# Altium PCB 宁波2号线PIS_数字功率放大器_网络音频(BHC-A-2030-02)_PCB(06001537)_V1.0.PcbDoc (part 3 of 7)
Units mm, origin at the board's own origin, x right, y up, seen from the top; angles counter-clockwise.
Board outline 86 x 96 mm, 4 copper layers (Top Layer, GND, VDD, Bottom Layer); 204 components, 185 nets, 781 pads, 267 vias.
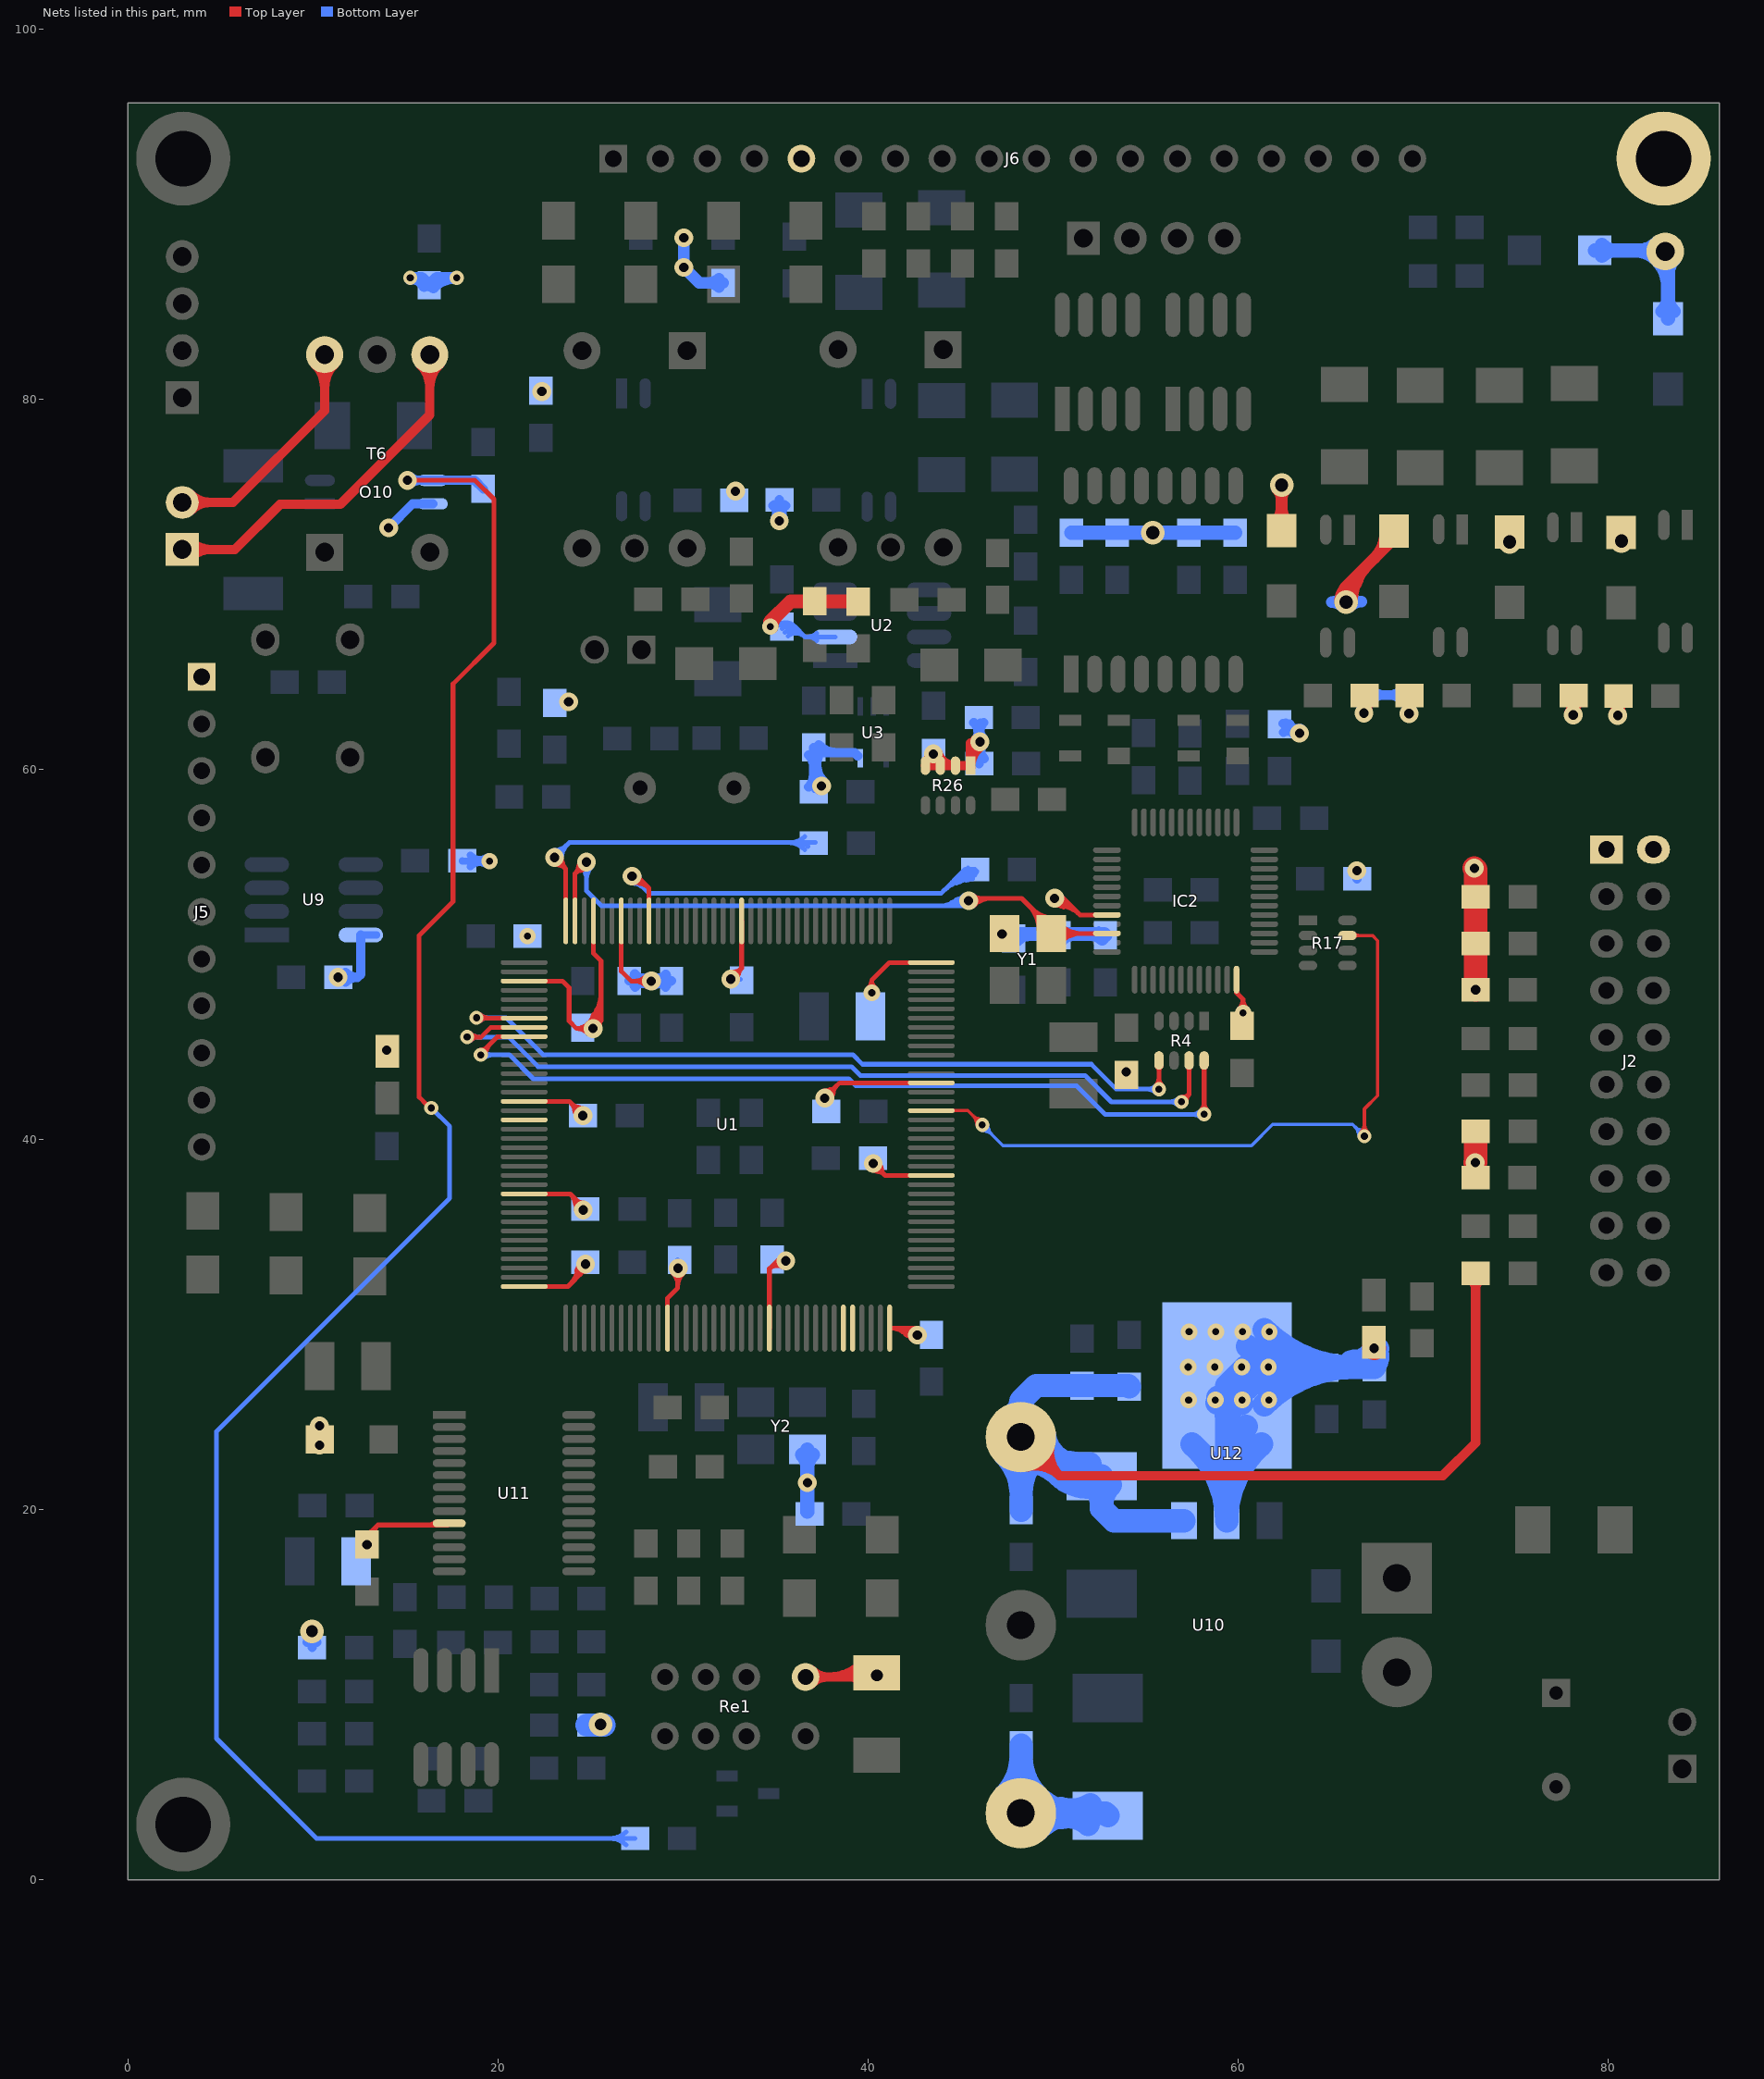
[diagram p5: the nets of this part, all layers, seen from the top]

## Via types
v1: diameter 1.016, hole 0.508, Top Layer to Bottom Layer, 122 vias
v2: diameter 0.762, hole 0.381, Top Layer to Bottom Layer, 48 vias
v3: diameter 0.889, hole 0.381, Top Layer to Bottom Layer, 37 vias
v4: diameter 1.27, hole 0.635, Top Layer to Bottom Layer, 28 vias
v5: diameter 1.27, hole 0.711, Top Layer to Bottom Layer, 20 vias
v6: diameter 0.762, hole 0.457, Top Layer to Bottom Layer, 11 vias
v7: diameter 1.143, hole 0.635, Top Layer to Bottom Layer, 1 vias

## Nets (pads, with @x,y where several pads share a name; then routed paths per layer and width w, separated by ;. In a path a pad name is that pad's centre, name@x,y a point inside that pad or via, vN(x,y) a via of type N, cw(c..) or ccw(c..) an arc to the next point about the centre after c; other vN are vias at no path point) (continued)
DC+3.3V: C7.1 C8.2 C9.1 C11.2 C22.2 C24.2 C34.2 C38.1 C39.2 C40.2 C41.2 C42.2 C43.2 C44.2 C47.2 C48.2 C49.2 C50.2 C51.2 C52.2 C53.2 C65.1 C66.1 C71.1 C74.1 IC2.32 IC2.48 J2.1 J2.2 J5.1 L3.1 L6.2 LED1.1 LED2.1 O10.4 R2.1 R7.2 R8.1 R10.1 R12.2 R13.1 R14.2 R15.2 R18.1 R21.2 R25.2 R26.1 R26.2 R26.3 R26.4 R32.1 R34.2 R36.2 R38.1 R43.2 R44.1 R45.1 R46.1 R47.1 R55.1 R56.1 R60.1 R61.1 R62.1 R65.1 R66.1 U1.17 U1.30 U1.33 U1.39 U1.52 U1.62 U1.72 U1.84 U1.95 U1.108 U1.121 U1.131 U1.144 U2.2 U3.5 U9.8 U11.10 U12.2 U12.4 Y1.4 Y2.4 | length 511.8
  Top Layer w0.254: v1(12.927,18.119) 12.927,18.592 13.513,19.177 ; C65.1@13.022,18.035 ccw(c12.314,18.668) C65.1@13.262,18.721 ; 16.442,19.218 cw(c16.533,19.061) U11.10@16.643,19.205 ; U11.10@17.374,19.271 17.28,19.177 13.513,19.177 ; U1.72@21.423,32.066 23.786,32.066 v1@24.587,32.868 ; U1.62@21.423,37.066 23.919,37.066 ; U1.52@21.423,42.066 23.872,42.066 v1@24.562,41.377 ; U1.39@21.423,48.566 23.494,48.566 23.851,48.209 23.851,46.406 24.257,45.999 ; 24.122,32.393 cw(c25.236,32.095) v1@24.789,33.157 ; 24.135,41.597 ccw(c24.707,41.75) v1@24.566,41.176 ; 24.155,36.629 ccw(c24.932,36.776) v1@24.551,36.084 ; 24.257,32.894 cw(c24.981,32.7) v1@24.69,33.391 ; 24.332,41.751 cw(c24.193,41.234) v1@24.722,41.32 ; v1@24.41,33.083 cw(c23.976,32.833) 24.46,32.703 ; v1@24.613,36.373 23.919,37.066 ; v1@25.047,46.367 ccw(c24.918,46.851) 25.352,46.601 ; U1.33@25.173,51.816 25.173,50.061 25.578,49.657 25.578,46.431 ; 25.176,46.749 ccw(c25.641,46.458) v1@25.239,46.086 ; v1@25.252,46.365 ccw(c25.331,46.635) 25.573,46.494 ; 25.352,47.03 ccw(c25.893,46.692) v1@25.425,46.258 ; v1@25.478,46.186 cw(c26.041,46.503) 25.482,46.826 ; v1@25.514,46.098 cw(c25.998,46.228) 25.564,46.478 ; U1.30@26.673,51.816 26.673,49.095 27.203,48.565 v1(28.296,48.565) ; U1.84@29.173,29.816 29.173,31.434 29.718,31.979 v1@29.718,32.741 ; v1@32.472,48.718 cw(c33.094,48.444) 32.969,49.112 ; v1(32.588,48.666) 33.173,49.252 ; v1@32.639,48.55 ccw(c32.366,49.172) 33.034,49.048 ; U1.17@33.173,51.816 33.173,49.252 ; U1.95@34.673,29.816 34.673,33.022 ; v1(35.56,33.452) 35.103,33.452 34.673,33.022 ; v1@37.543,42.263 cw(c38.081,42.166) 37.94,42.694 ; v1(37.668,42.24) 37.668,42.266 38.469,43.066 U1.131@43.423,43.066 ; v1@37.697,42.116 ccw(c37.567,42.682) 38.127,42.532 ; v1@40.16,38.682 ccw(c40.716,38.805) 40.573,38.254 ; v3(40.208,47.93) 40.208,48.616 ; v1(40.284,38.71) 40.928,38.066 ; v1@40.312,38.834 cw(c40.189,38.278) 40.74,38.421 ; 41.832,29.64 ccw(c42.083,29.953) v1@42.385,29.689 ; 42.039,29.474 ccw(c42.283,29.779) v1@42.576,29.522 ; v1@42.292,29.417 ccw(c41.893,29.394) 42.143,29.705 ccw(c42.271,29.865) v1@42.411,29.716 ; v1@42.647,29.816 U1.108@41.173,29.816 ; U1.121@43.423,38.066 40.928,38.066 ; U1.144@43.423,49.566 41.159,49.566 40.208,48.616 ; v1@49.983,52.965 ccw(c50.776,53.488) 50.585,52.558 ; v1(50.089,53.035) 50.571,53.035 51.467,52.14 ; v1@50.298,52.717 cw(c50.574,52.299) 50.675,52.789 ; IC2.32@52.917,52.14 51.467,52.14 ; R8.1@53.924,44.094 53.959,44.06 R8.1@53.959,43.493 ; IC2.48@59.917,48.64 59.917,47.931 60.274,47.574 ; v3(60.274,46.838) 60.274,47.574 ; 13.513,19.177 ccw(c14.164,18.526) 13.289,18.238 cw(c14.164,18.526) 13.513,19.177 ; 13.513,19.177 ccw(c13.96,18.73) 13.387,18.462 cw(c13.96,18.73) 13.513,19.177 ; 23.919,37.066 cw(c23.156,36.303) 24.233,36.223 ccw(c23.156,36.303) 23.919,37.066 ; 24.257,45.999 cw(c24.257,45.153) 24.87,45.737 ccw(c24.257,45.153) 24.257,45.999 ; 24.257,45.999 ccw(c24.257,46.846) 24.87,46.262 cw(c24.257,46.846) 24.257,45.999 ; 24.257,45.999 v1(25.146,45.999) 25.578,46.431 ; 25.578,46.431 cw(c25.366,46.643) 25.27,46.36 ccw(c25.366,46.643) 25.578,46.431 ; 25.578,46.431 ccw(c25.789,46.22) 25.506,46.123 cw(c25.789,46.22) 25.578,46.431 ; 27.376,48.565 cw(c27.376,47.645) 28.026,48.295 ccw(c27.376,47.645) 27.376,48.565 ; 27.376,48.565 ccw(c27.376,49.485) 28.026,48.834 cw(c27.376,49.485) 27.376,48.565 ; 33.173,49.252 cw(c32.673,49.752) 32.618,49.046 ccw(c32.673,49.752) 33.173,49.252 ; 33.173,49.252 ccw(c33.674,48.751) 32.968,48.696 cw(c33.674,48.751) 33.173,49.252 ; 34.673,33.022 cw(c35.088,32.608) 35.374,33.119 ccw(c35.088,32.608) 34.673,33.022 ; 40.208,48.616 cw(c39.626,48.616) 40.003,48.172 ccw(c39.626,48.616) 40.208,48.616 ; 40.208,48.616 ccw(c40.79,48.616) 40.414,48.172 cw(c40.79,48.616) 40.208,48.616 ; 40.928,38.066 cw(c41.562,38.7) 40.665,38.707 ccw(c41.562,38.7) 40.928,38.066 ; 40.928,38.066 ccw(c40.294,37.432) 40.287,38.329 cw(c40.294,37.432) 40.928,38.066 ; U1.108@41.173,29.816 cw(c41.173,28.337) 42.365,29.213 ccw(c41.173,28.337) U1.108@41.173,29.816 ; 51.467,52.14 ccw(c50.216,50.888) 50.111,52.655 cw(c50.216,50.888) 51.467,52.14 ; 60.274,47.574 cw(c59.579,47.574) 60.056,47.068 ccw(c59.579,47.574) 60.274,47.574 ; 60.274,47.574 ccw(c60.97,47.574) 60.492,47.068 cw(c60.97,47.574) 60.274,47.574 ; 60.274,47.574 cw(c58.966,47.574) 59.871,46.629 ccw(c58.966,47.574) 60.274,47.574 ; C65.1@12.927,18.754 ccw(c12.927,19.147) 13.205,18.869 cw(c12.927,19.147) C65.1@12.927,18.754 ; C65.1@13.048,18.159 cw(c13.724,18.382) 13.221,18.885 ccw(c13.724,18.382) C65.1@13.048,18.159 ; C65.1@13.157,18.354 cw(c13.611,18.567) 13.257,18.921 ccw(c13.611,18.567) C65.1@13.157,18.354 ; 16.267,19.177 ccw(c16.267,19.697) 16.635,19.329 cw(c16.267,19.697) 16.267,19.177 ; 23.91,32.19 ccw(c22.826,33.274) 24.359,33.274 cw(c22.826,33.274) 23.91,32.19 ; 23.916,42.023 cw(c23.192,41.299) 24.215,41.299 ccw(c23.192,41.299) 23.916,42.023 ; 24.019,41.919 ccw(c24.596,42.497) 24.596,41.68 cw(c24.596,42.497) 24.019,41.919 ; 24.266,36.72 ccw(c24.613,37.067) 24.613,36.576 cw(c24.613,37.067) 24.266,36.72 ; 24.311,36.674 cw(c23.886,36.249) 24.486,36.204 ccw(c23.886,36.249) 24.311,36.674 ; 24.343,32.624 ccw(c23.693,33.274) 24.613,33.274 cw(c23.693,33.274) 24.343,32.624 ; 24.523,32.803 cw(c24.74,32.586) 24.74,32.893 ccw(c24.74,32.586) 24.523,32.803 ; v1@24.877,46.269 ccw(c23.184,47.962) 25.578,47.962 cw(c23.184,47.962) v1@24.877,46.269 ; v1@25.056,46.089 ccw(c23.797,47.348) 25.578,47.348 cw(c23.797,47.348) v1@25.056,46.089 ; v1@25.236,45.91 ccw(c24.41,46.735) 25.578,46.735 cw(c24.41,46.735) v1@25.236,45.91 ; v1@29.474,32.776 cw(c28.885,32.187) 29.718,32.187 ccw(c28.885,32.187) v1@29.474,32.776 ; 29.718,32.064 cw(c30.725,32.064) 30.013,32.776 ccw(c30.725,32.064) 29.718,32.064 ; 34.911,33.26 cw(c35.258,32.912) 35.498,33.341 ccw(c35.258,32.912) 34.911,33.26 ; v1@37.668,42.621 ccw(c37.668,43.48) 38.275,42.873 cw(c37.668,43.48) v1@37.668,42.621 ; v1@38.049,42.24 cw(c39.03,42.24) 38.337,42.934 ccw(c39.03,42.24) v1@38.049,42.24 ; 41.675,29.816 cw(c41.675,28.706) 42.57,29.363 ccw(c41.675,28.706) 41.675,29.816 ; 42.177,29.816 cw(c42.177,29.075) 42.774,29.514 ccw(c42.177,29.075) 42.177,29.816 ; v1@50.081,53.162 cw(c50.126,52.398) 50.667,52.939 ccw(c50.126,52.398) v1@50.081,53.162 ; v1@50.096,52.908 cw(c50.171,51.643) 51.067,52.539 ccw(c50.171,51.643) v1@50.096,52.908 ; IC2.48@59.94,48.04 ccw(c60.257,48.04) 60.033,47.815 cw(c60.257,48.04) IC2.48@59.94,48.04 ; C9.1@60.047,46.446 ccw(c59.536,46.979) 60.274,46.979 cw(c59.536,46.979) C9.1@60.047,46.446 ; 60.274,47.363 ccw(c61.323,47.363) 60.581,46.622 cw(c61.323,47.363) 60.274,47.363
  Top Layer w0.508: v1(13.995,44.831) 14.021,44.806 LED1.1@14.021,44.78 ; R26.4@43.104,60.198 R26.3@43.917,60.198 R26.2@44.729,60.198 ; v1@43.292,60.76 ccw(c44.047,60.986) R26.3@44.047,60.198 ; v1@43.779,60.906 ccw(c44.729,61.19) R26.2@44.729,60.198 ; R26.1@45.542,60.102 cw(c46.94,60.102) v1@46.187,61.279 ; 45.542,61.03 cw(c46.347,61.03) v1@45.913,61.707 ; 45.542,61.417 R26.1@45.542,60.198 R26.2@44.729,60.198 ; v1@66.712,63.28 ccw(c66.498,63.842) R61.1@67.078,63.686 ; R61.1@66.764,63.672 cw(c66.517,63.29) 66.972,63.29 cw(c67.429,63.29) R61.1@67.18,63.673 ; v1@66.845,63.043 R61.1@66.845,63.992 ; R55.1@69.24,64.016 R55.1@69.274,64.049 ; R62.1@77.817,63.67 cw(c77.574,63.283) 78.031,63.283 cw(c78.512,63.283) R62.1@78.238,63.679 ; v1@77.904,63.083 ccw(c77.484,63.367) R62.1@77.973,63.498 ; R62.1@77.973,63.498 ccw(c78.494,63.638) v1@78.236,63.164 ; v1@78,63.168 ccw(c77.709,63.75) R62.1@78.338,63.582 ; R62.1@78.032,63.698 cw(c77.657,63.243) 78.247,63.243 cw(c78.756,63.243) R62.1@78.481,63.672 ; v1(78.114,62.941) R62.1@78.114,63.958 ; R56.1@80.22,63.652 cw(c79.97,63.259) 80.436,63.259 cw(c80.928,63.259) R56.1@80.644,63.662 ; v1@80.307,63.058 ccw(c79.883,63.344) 80.377,63.476 ccw(c80.909,63.619) v1@80.641,63.138 ; v1@80.403,63.142 ccw(c80.103,63.731) R56.1@80.741,63.56 ; R56.1@80.434,63.681 cw(c80.048,63.219) 80.65,63.219 cw(c81.168,63.219) R56.1@80.886,63.654 ; v1(80.518,62.916) R56.1@80.518,63.94 ; v1@66.708,63.279 ccw(c66.537,63.708) R61.1@66.983,63.588 ; v1@66.708,63.279 ccw(c66.537,63.708) R61.1@66.983,63.588 ; v1@66.708,63.279 ccw(c66.537,63.708) R61.1@66.983,63.588 ; v1@66.845,63.072 cw(c67.764,63.072) 67.114,63.723 ccw(c67.764,63.072) v1@66.845,63.072 ; v1@66.845,63.072 ccw(c65.925,63.072) 66.575,63.723 cw(c65.925,63.072) v1@66.845,63.072 ; R61.1@66.972,63.548 ccw(c67.454,63.419) v1@67.022,63.17 ; R61.1@66.972,63.548 ccw(c67.454,63.419) v1@67.022,63.17 ; R61.1@66.972,63.548 ccw(c67.454,63.419) v1@67.022,63.17 ; v1@77.937,63.123 ccw(c77.693,63.374) R62.1@78.031,63.464 ; v1@77.937,63.123 ccw(c77.693,63.374) R62.1@78.031,63.464 ; v1@77.937,63.123 ccw(c77.693,63.374) R62.1@78.031,63.464 ; v1@77.993,63.164 ccw(c77.745,63.621) R62.1@78.247,63.487 ; v1@77.993,63.164 ccw(c77.745,63.621) R62.1@78.247,63.487 ; v1@77.993,63.164 ccw(c77.745,63.621) R62.1@78.247,63.487 ; R62.1@78.114,63.554 cw(c77.501,63.554) 77.934,63.121 ccw(c77.501,63.554) R62.1@78.114,63.554 ; R62.1@78.114,63.554 ccw(c78.727,63.554) 78.294,63.121 cw(c78.727,63.554) R62.1@78.114,63.554 ; R62.1@78.247,63.487 ccw(c78.7,63.365) v1@78.32,63.09 ; R62.1@78.247,63.487 ccw(c78.7,63.365) v1@78.32,63.09 ; R62.1@78.247,63.487 ccw(c78.7,63.365) v1@78.32,63.09 ; v1@80.341,63.098 ccw(c80.094,63.351) R56.1@80.436,63.442 ; v1@80.341,63.098 ccw(c80.094,63.351) R56.1@80.436,63.442 ; v1@80.341,63.098 ccw(c80.094,63.351) R56.1@80.436,63.442 ; v1@80.395,63.138 ccw(c80.136,63.603) R56.1@80.65,63.465 ; v1@80.395,63.138 ccw(c80.136,63.603) R56.1@80.65,63.465 ; v1@80.395,63.138 ccw(c80.136,63.603) R56.1@80.65,63.465 ; R56.1@80.518,63.529 cw(c79.905,63.529) 80.338,63.095 ccw(c79.905,63.529) R56.1@80.518,63.529 ; R56.1@80.518,63.529 ccw(c81.131,63.529) 80.698,63.095 cw(c81.131,63.529) R56.1@80.518,63.529 ; R56.1@80.65,63.465 ccw(c81.108,63.342) v1@80.724,63.065 ; R56.1@80.65,63.465 ccw(c81.108,63.342) v1@80.724,63.065 ; R56.1@80.65,63.465 ccw(c81.108,63.342) v1@80.724,63.065 ; v1@66.622,63.222 ccw(c66.086,63.759) 66.845,63.759 cw(c66.086,63.759) v1@66.622,63.222 ; R61.1@66.845,63.553 ccw(c67.312,63.553) 66.982,63.222 cw(c67.312,63.553) R61.1@66.845,63.553 ; R62.1@77.878,63.723 cw(c77.309,63.153) 78.114,63.153 ccw(c77.309,63.153) R62.1@77.878,63.723 ; v1@78.114,62.991 cw(c79.149,62.991) 78.417,63.723 ccw(c79.149,62.991) v1@78.114,62.991 ; R56.1@80.282,63.704 cw(c79.713,63.135) 80.518,63.135 ccw(c79.713,63.135) R56.1@80.282,63.704 ; v1@80.518,62.972 cw(c81.553,62.972) 80.821,63.704 ccw(c81.553,62.972) v1@80.518,62.972
  Top Layer w0.762: v3(34.722,67.716) 34.722,67.97 35.822,69.071 R7.2@39.481,69.071 ; v3@34.785,67.716 cw(c35.552,67.716) 35.01,68.258 ccw(c35.552,67.716) v3@34.785,67.716 ; 36.444,69.071 ccw(c36.444,69.771) 36.939,69.276 cw(c36.444,69.771) 36.444,69.071 ; R25.2@37.298,69.276 ccw(c37.793,69.771) 37.793,69.071 cw(c37.793,69.771) R25.2@37.298,69.276
  Top Layer w1.27: LED2.1@67.335,28.753 v1(67.361,28.727) ; v1(72.771,54.661) 72.839,54.593 R12.2@72.839,53.121 v1(72.839,48.092) ; v1(72.822,38.76) 72.839,38.778 R15.2@72.839,40.446
  Bottom Layer w0.254: C39.2@24.562,41.377 C39.2@24.596,41.342 ; C48.2@24.596,33.359 C48.2@24.613,33.376 ; C47.2@24.622,36.331 C47.2@24.638,36.347 ; C40.2@25.111,46.034 v1(25.146,45.999) ; C49.2@29.718,33.452 C49.2@29.718,33.511 ; C43.2@33.122,48.656 C43.2@33.122,48.666 ; C24.2@35.358,67.726 36.033,67.726 ; R18.1@37.092,58.861 37.092,59.504 ; 37.109,59.665 37.092,59.647 ; U2.2@38.227,67.158 36.601,67.158 ; C52.2@40.275,38.719 v1(40.284,38.71) ; C7.1@47.304,51.045 C8.2@50.316,51.045 C11.2@52.831,51.045 ; 36.033,67.726 cw(c36.033,67.921) 35.846,67.866 ccw(c36.033,67.921) 36.033,67.726 ; 36.033,67.726 ccw(c36.033,67.531) 35.846,67.585 cw(c36.033,67.531) 36.033,67.726 ; 36.033,67.726 36.601,67.158 ; 36.601,67.158 ccw(c36.114,66.67) 35.679,67.205 cw(c36.114,66.67) 36.601,67.158 ; 36.768,67.158 cw(c36.768,66.499) 37.234,66.965 ccw(c36.768,66.499) 36.768,67.158 ; 36.768,67.158 ccw(c36.768,67.817) 37.234,67.351 cw(c36.768,67.817) 36.768,67.158 ; R18.1@36.92,59.271 ccw(c36.849,59.504) 37.092,59.504 ; R18.1@36.92,59.271 ccw(c36.849,59.504) 37.092,59.504 ; R18.1@36.92,59.271 ccw(c36.849,59.504) 37.092,59.504 ; R18.1@36.92,59.271 ccw(c36.849,59.504) 37.092,59.504 ; 37.092,59.504 ccw(c37.361,59.504) R18.1@37.259,59.255 ; 37.092,59.504 ccw(c37.361,59.504) R18.1@37.259,59.255 ; 37.092,59.504 ccw(c37.361,59.504) R18.1@37.259,59.255 ; 37.092,59.504 ccw(c37.361,59.504) R18.1@37.259,59.255 ; 37.092,59.504 37.092,59.647 ; 37.092,59.647 cw(c36.636,59.647) 36.84,59.24 ccw(c36.636,59.647) 37.092,59.647 ; 37.092,59.647 ccw(c37.596,59.647) 37.333,59.218 cw(c37.596,59.647) 37.092,59.647 ; 49.09,51.045 cw(c49.09,49.818) 49.957,50.686 ccw(c49.09,49.818) 49.09,51.045 ; 49.09,51.045 ccw(c49.09,52.271) 49.957,51.404 cw(c49.09,52.271) 49.09,51.045 ; 51.543,51.045 cw(c51.543,52.271) 50.675,51.404 ccw(c51.543,52.271) 51.543,51.045 ; 51.543,51.045 ccw(c51.543,49.818) 50.675,50.686 cw(c51.543,49.818) 51.543,51.045 ; 51.604,51.045 cw(c51.604,49.818) 52.472,50.686 ccw(c51.604,49.818) 51.604,51.045 ; 51.604,51.045 ccw(c51.604,52.271) 52.472,51.404 cw(c51.604,52.271) 51.604,51.045 ; C24.2@35.198,67.796 cw(c35.578,67.328) 36.005,67.754 ccw(c35.578,67.328) C24.2@35.198,67.796 ; C24.2@35.358,67.599 cw(c35.757,67.109) 36.204,67.555 ccw(c35.757,67.109) C24.2@35.358,67.599 ; C24.2@35.518,67.402 cw(c35.935,66.89) 36.402,67.357 ccw(c35.935,66.89) C24.2@35.518,67.402 ; C7.1@47.513,50.835 cw(c48.019,50.33) 48.019,51.045 ccw(c48.019,50.33) C7.1@47.513,50.835 ; C7.1@47.513,51.374 ccw(c48.309,52.169) 48.309,51.045 cw(c48.309,52.169) C7.1@47.513,51.374 ; C7.1@48.059,50.824 cw(c48.593,50.29) 48.593,51.045 ccw(c48.593,50.29) C7.1@48.059,50.824 ; C7.1@48.238,50.644 cw(c49.206,49.676) 49.206,51.045 ccw(c49.206,49.676) C7.1@48.238,50.644 ; C7.1@48.238,51.362 ccw(c49.005,52.129) 49.005,51.045 cw(c49.005,52.129) C7.1@48.238,51.362
  Bottom Layer w0.381: U9.8@12.598,51.054 U9.8@13.462,51.054 ; R66.1@18.077,55.058 18.093,55.042 v3(19.558,55.042) ; 18.857,55.165 ccw(c19.037,55.839) v3@19.419,55.254 ; 18.857,55.165 ccw(c19.037,55.839) v3@19.419,55.254 ; 18.857,55.165 ccw(c19.037,55.839) v3@19.419,55.254 ; 18.867,54.942 cw(c19.03,54.337) v3@19.406,54.839 ; 18.867,54.942 cw(c19.03,54.337) v3@19.406,54.839 ; 18.867,54.942 cw(c19.03,54.337) v3@19.406,54.839 ; 18.945,55.042 cw(c18.945,54.429) 19.378,54.862 ccw(c18.945,54.429) 18.945,55.042 ; 18.945,55.042 ccw(c18.945,55.655) 19.378,55.221 cw(c18.945,55.655) 18.945,55.042 ; 19.096,55.101 cw(c18.993,54.715) v3@19.338,54.915 ; 19.096,55.101 cw(c18.993,54.715) v3@19.338,54.915 ; 19.096,55.101 cw(c18.993,54.715) v3@19.338,54.915 ; R66.1@18.518,54.743 cw(c19.238,54.023) 19.238,55.042 ccw(c19.238,54.023) R66.1@18.518,54.743 ; R66.1@18.518,55.372 ccw(c19.315,56.17) 19.315,55.042 cw(c19.315,56.17) R66.1@18.518,55.372
  Bottom Layer w0.508: v1(11.37,48.769) 12.422,48.769 12.598,48.946 U9.8@12.598,51.054 ; v1(14.097,73.05) 15.392,74.346 O10.4@16.485,74.346 ; C42.2@27.101,48.581 C41.2@29.387,48.581 29.37,48.565 v1(28.296,48.565) ; C42.2@27.37,48.439 cw(c27.951,47.857) v1@27.951,48.679 ; C42.2@27.37,48.723 ccw(c27.917,49.271) v1@27.917,48.497 ; C42.2@27.398,48.947 ccw(c27.955,49.395) v1@27.955,48.679 ; C42.2@27.411,48.232 cw(c27.924,47.865) v1@27.924,48.497 ; C42.2@27.657,48.759 cw(c27.478,48.093) v1@28.076,48.438 ; C42.2@27.659,48.426 cw(c27.823,47.815) v1@28.16,48.35 ; 27.762,48.731 ccw(c27.9,49.249) v1@28.169,48.785 ; 27.766,48.454 ccw(c27.634,48.947) v1@28.076,48.692 ; v1@28.423,48.345 cw(c28.73,47.812) C41.2@28.889,48.406 ; v1@28.436,48.353 cw(c28.732,47.905) C41.2@28.871,48.423 ; v1@28.516,48.439 cw(c29.156,48.075) C41.2@28.966,48.786 ; v1@28.517,48.44 cw(c29.115,48.101) C41.2@28.937,48.765 ; C41.2@28.783,48.737 cw(c28.66,49.196) 28.423,48.785 ccw(c28.682,49.235) C41.2@28.817,48.733 ; C41.2@28.862,48.426 cw(c29.01,48.977) 28.516,48.692 ccw(c29.045,48.997) C41.2@28.887,48.407 ; C41.2@29.064,48.251 ccw(c28.642,47.987) 28.642,48.485 ccw(c28.642,49.07) C41.2@29.093,48.697 ; C41.2@29.069,48.243 ccw(c28.639,47.956) 28.639,48.473 ccw(c28.639,49.046) C41.2@29.088,48.691 ; C41.2@29.07,48.92 cw(c28.62,49.222) 28.62,48.68 cw(c28.62,48.052) C41.2@29.097,48.46 ; C41.2@29.077,48.93 cw(c28.612,49.264) 28.612,48.691 cw(c28.612,48.066) C41.2@29.093,48.465 ; R10.1@34.866,74.247 cw(c34.527,73.768) 35.114,73.768 cw(c35.797,73.768) R10.1@35.34,74.275 ; v1@34.993,73.55 ccw(c34.479,73.847) R10.1@35.052,74.001 ; R10.1@35.045,74.027 ccw(c35.656,74.191) v1@35.34,73.643 ; R10.1@35.085,74.275 cw(c34.628,73.768) 35.311,73.768 cw(c35.898,73.768) R10.1@35.559,74.247 ; v1@35.086,73.643 ccw(c34.769,74.191) R10.1@35.381,74.027 ; v1(35.213,73.423) R10.1@35.213,74.558 ; R10.1@35.373,74.001 ccw(c35.947,73.847) v1@35.433,73.55 ; R43.2@36.877,60.723 cw(c36.557,60.168) 37.177,60.334 ; R43.2@37.068,61.18 37.068,59.528 ; R43.2@37.119,60.901 38.356,60.901 ; 37.209,60.084 cw(c36.366,59.598) R18.1@37.258,59.208 ; 37.278,59.954 cw(c38.435,60.264) R43.2@37.398,60.863 ; v1(37.49,59.106) 37.092,59.504 37.068,59.528 ; U3.5@39.446,60.731 39.277,60.901 38.356,60.901 ; R34.2@45.722,62.535 cw(c44.929,61.742) v1@46.05,61.742 ; R36.2@45.747,60.585 ccw(c45.097,61.235) 46.017,61.235 ccw(c46.936,61.235) R36.2@46.286,60.585 ; v1@45.833,61.362 cw(c45.252,61.009) R36.2@45.909,60.833 ; v1@45.838,61.633 ccw(c45.257,62.015) R34.2@45.929,62.195 ; v1@45.871,61.314 cw(c45.518,60.961) 46.017,60.961 ; v1@45.871,61.673 ccw(c45.437,62.107) 46.05,62.107 ccw(c46.663,62.107) v1@46.23,61.673 ; 45.946,60.972 cw(c46.425,60.844) v1@46.177,61.273 ; R36.2@46.017,60.316 46.017,61.46 v1(46.05,61.493) 46.05,62.46 R34.2@46.084,62.494 ; R36.2@46.017,60.799 cw(c46.745,60.799) v1@46.23,61.314 ; 46.05,62.027 cw(c46.768,62.027) R34.2@46.261,62.535 ; R36.2@46.095,60.942 cw(c46.426,61.03) v1@46.21,61.296 ; L3.1@62.443,62.476 v1@62.968,61.951 ; L3.1@62.448,62.004 cw(c62.675,61.658) v1@62.968,61.951 ; L3.1@62.581,62.491 ccw(c63.449,62.917) v1@63.449,61.951 ; L3.1@62.811,62.444 ccw(c63.449,62.609) v1@63.449,61.951 ; v1@63.283,62.202 cw(c63.133,63.166) 62.443,62.476 ccw(c63.171,63.204) v1@63.394,62.199 ; v1(66.421,54.534) 66.429,54.526 R21.2@66.429,54.086 ; 66.575,63.755 cw(c65.941,63.12) v1@66.838,63.12 ; v1@66.838,63.043 66.838,64.017 69.223,64.017 v1@69.223,63.144 ; v1@66.838,63.088 cw(c67.78,63.088) 67.114,63.755 ; 67.241,63.755 cw(c67.875,63.12) 67.875,64.017 ; 67.241,64.293 ccw(c67.907,64.96) 67.907,64.017 ; 68.827,63.748 ccw(c68.176,63.098) 68.176,64.017 ccw(c68.176,64.937) 68.827,64.287 ; 68.964,63.738 cw(c68.414,63.144) v1@69.223,63.144 ; 69.482,63.738 ccw(c70.033,63.144) v1@69.223,63.144 ; C53.2@11.983,48.769 cw(c11.983,49.382) 11.55,48.949 ccw(c11.983,49.382) C53.2@11.983,48.769 ; C53.2@11.983,48.769 ccw(c11.983,48.156) 11.55,48.59 cw(c11.983,48.156) C53.2@11.983,48.769 ; 12.417,48.769 cw(c12.417,49.689) 11.766,49.039 ccw(c12.417,49.689) 12.417,48.769 ; 12.417,48.769 ccw(c12.417,47.849) 11.766,48.5 cw(c12.417,47.849) 12.417,48.769 ; C42.2@27.653,48.679 ccw(c27.804,49.242) v1@28.147,48.77 ; C42.2@27.653,48.679 ccw(c27.804,49.242) v1@28.147,48.77 ; C42.2@27.653,48.679 ccw(c27.804,49.242) v1@28.147,48.77 ; C42.2@27.706,48.497 cw(c27.815,48.089) v1@28.115,48.386 ; C42.2@27.706,48.497 cw(c27.815,48.089) v1@28.115,48.386 ; C42.2@27.706,48.497 cw(c27.815,48.089) v1@28.115,48.386 ; v1@28.02,48.581 cw(c28.02,49.501) 27.37,48.85 ccw(c28.02,49.501) v1@28.02,48.581 ; v1@28.02,48.581 ccw(c28.02,47.661) 27.37,48.312 cw(c28.02,47.661) v1@28.02,48.581 ; v1@28.444,48.771 ccw(c28.745,49.19) C41.2@28.879,48.691 ; v1@28.444,48.771 ccw(c28.745,49.19) C41.2@28.879,48.691 ; v1@28.444,48.771 ccw(c28.745,49.19) C41.2@28.879,48.691 ; v1@28.453,48.764 ccw(c28.739,49.124) C41.2@28.858,48.68 ; v1@28.453,48.764 ccw(c28.739,49.124) C41.2@28.858,48.68 ; v1@28.453,48.764 ccw(c28.739,49.124) C41.2@28.858,48.68 ; v1@28.467,48.581 cw(c28.467,47.661) C41.2@29.117,48.312 ; v1@28.467,48.581 ccw(c28.467,49.501) C41.2@29.117,48.85 ; v1@28.467,48.581 ccw(c28.467,49.501) C41.2@29.117,48.85 ; v1@28.467,48.581 cw(c28.467,47.661) C41.2@29.117,48.312 ; v1@28.469,48.379 cw(c28.743,48.085) C41.2@28.847,48.473 ; v1@28.469,48.379 cw(c28.743,48.085) C41.2@28.847,48.473 ; v1@28.469,48.379 cw(c28.743,48.085) C41.2@28.847,48.473 ; v1@28.475,48.385 cw(c28.909,47.952) C41.2@28.909,48.565 ; v1@28.475,48.385 cw(c28.948,47.912) 28.948,48.581 ccw(c28.948,47.912) v1@28.475,48.385 ; v1@28.475,48.385 cw(c28.909,47.952) C41.2@28.909,48.565 ; v1@28.475,48.744 ccw(c28.909,49.178) C41.2@28.909,48.565 ; v1@28.475,48.744 ccw(c28.87,49.139) 28.87,48.581 cw(c28.87,49.139) v1@28.475,48.744 ; v1@28.475,48.744 ccw(c28.909,49.178) C41.2@28.909,48.565 ; v1@28.478,48.388 cw(c28.734,48.141) C41.2@28.826,48.485 ; v1@28.478,48.388 cw(c28.734,48.141) C41.2@28.826,48.485 ; v1@28.478,48.388 cw(c28.734,48.141) C41.2@28.826,48.485 ; v1@28.516,48.438 cw(c28.946,48.19) C41.2@28.817,48.669 ; v1@28.516,48.438 cw(c28.962,48.18) C41.2@28.829,48.678 ; v1@28.516,48.438 cw(c28.946,48.19) C41.2@28.817,48.669 ; v1@28.516,48.438 cw(c28.962,48.18) C41.2@28.829,48.678 ; v1@28.516,48.438 cw(c28.946,48.19) C41.2@28.817,48.669 ; v1@28.516,48.438 cw(c28.962,48.18) C41.2@28.829,48.678 ; C41.2@29.117,48.312 ccw(c28.506,47.7) 28.506,48.565 cw(c28.506,47.7) C41.2@29.117,48.312 ; C41.2@29.117,48.85 cw(c28.428,49.54) 28.428,48.565 ccw(c28.428,49.54) C41.2@29.117,48.85 ; v1@35.02,73.588 ccw(c34.672,73.887) R10.1@35.114,74.005 ; v1@35.02,73.588 ccw(c34.672,73.887) R10.1@35.114,74.005 ; v1@35.02,73.588 ccw(c34.672,73.887) R10.1@35.114,74.005 ; v1@35.213,73.639 cw(c36.132,73.639) 35.482,74.289 ccw(c36.132,73.639) v1@35.213,73.639 ; v1@35.213,73.639 ccw(c34.293,73.639) 34.943,74.289 cw(c34.293,73.639) v1@35.213,73.639 ; R10.1@35.213,74.036 cw(c34.599,74.036) 35.033,73.603 ccw(c34.599,74.036) R10.1@35.213,74.036 ; R10.1@35.213,74.036 ccw(c35.826,74.036) 35.392,73.603 cw(c35.826,74.036) R10.1@35.213,74.036 ; R10.1@35.311,74.005 ccw(c35.753,73.887) v1@35.406,73.588 ; R10.1@35.311,74.005 ccw(c35.753,73.887) v1@35.406,73.588 ; R10.1@35.311,74.005 ccw(c35.753,73.887) v1@35.406,73.588 ; 37.051,59.585 ccw(c37.774,59.487) R18.1@37.339,58.902 ; 37.051,59.585 ccw(c37.774,59.487) R18.1@37.339,58.902 ; 37.051,59.585 ccw(c37.774,59.487) R18.1@37.339,58.902 ; 37.068,59.528 cw(c36.535,59.528) 36.845,59.095 ccw(c36.535,59.528) 37.068,59.528 ; 37.068,59.528 ccw(c37.604,59.528) 37.29,59.094 cw(c37.604,59.528) 37.068,59.528 ; 37.068,60.134 cw(c37.988,60.134) 37.337,60.784 ccw(c37.988,60.134) 37.068,60.134 ; 37.068,60.134 ccw(c36.148,60.134) 36.799,60.784 cw(c36.148,60.134) 37.068,60.134 ; 38.356,60.901 cw(c38.356,62.341) 37.337,61.323 ccw(c38.356,62.341) 38.356,60.901 ; v1@62.968,61.951 v1@63.449,61.951 ; 69.122,63.522 cw(c68.757,63.424) 69.046,63.181 ccw(c68.757,63.424) 69.122,63.522 ; 69.122,63.522 ccw(c69.537,63.633) 69.351,63.246 cw(c69.537,63.633) 69.122,63.522 ; C42.2@27.643,48.581 cw(c27.643,47.912) 28.116,48.385 ccw(c27.643,47.912) C42.2@27.643,48.581 ; C42.2@27.722,48.581 ccw(c27.722,49.139) 28.116,48.744 cw(c27.722,49.139) C42.2@27.722,48.581 ; R18.1@36.797,59.054 ccw(c36.144,59.708) 37.068,59.708 cw(c36.144,59.708) R18.1@36.797,59.054 ; 37.068,59.512 ccw(c37.897,59.512) 37.311,58.926 cw(c37.897,59.512) 37.068,59.512 ; 37.068,59.702 ccw(c37.984,59.702) 37.336,59.054 cw(c37.984,59.702) 37.068,59.702 ; R43.2@37.068,60.739 ccw(c39.123,60.739) 37.67,59.285 cw(c39.123,60.739) R43.2@37.068,60.739 ; v1@66.622,63.222 ccw(c66.102,63.743) 66.838,63.743 cw(c66.102,63.743) v1@66.622,63.222 ; v1@66.699,63.275 ccw(c66.498,63.726) 66.975,63.598 cw(c66.498,63.726) v1@66.699,63.275 ; 66.838,63.569 ccw(c67.328,63.569) 66.982,63.222 cw(c67.328,63.569) 66.838,63.569 ; 66.969,63.576 ccw(c67.485,63.437) 67.022,63.17 cw(c67.485,63.437) 66.969,63.576 ; v1@69.061,63.197 ccw(c68.669,63.589) 69.223,63.589 cw(c68.669,63.589) v1@69.061,63.197 ; 69.223,63.672 ccw(c69.895,63.672) 69.42,63.197 cw(c69.895,63.672) 69.223,63.672
  Bottom Layer w0.762: C34.2@36.719,19.889 v1@36.719,21.463 ; v1(36.728,21.463) v1@36.719,21.463 ; Y2.4@36.728,23.266 36.719,23.257 v1@36.719,21.463 ; v1(47.244,51.105) 52.771,51.105 C11.2@52.831,51.045 ; R44.1@50.987,72.788 R45.1@53.476,72.788 v5(55.397,72.788) R46.1@57.337,72.788 R47.1@59.852,72.788 ; Y2.4@36.432,22.97 cw(c35.739,22.277) 36.719,22.277 ccw(c35.739,22.277) Y2.4@36.432,22.97 ; 36.719,22.233 cw(c37.762,22.233) 37.025,22.97 ccw(c37.762,22.233) 36.719,22.233 ; C7.1@48.059,50.824 cw(c48.737,50.145) 48.737,51.105 ccw(c48.737,50.145) C7.1@48.059,50.824 ; 49.558,51.105 cw(c49.558,50.287) 50.137,50.865 ccw(c49.558,50.287) 49.558,51.105 ; C8.2@50.496,50.865 cw(c51.074,50.287) 51.074,51.105 ccw(c51.074,50.287) C8.2@50.496,50.865 ; 52.073,51.105 cw(c52.073,50.287) 52.651,50.865 ccw(c52.073,50.287) 52.073,51.105
  Bottom Layer w1.27: 66.076,27.975 cw(c66.472,26.701) C71.1@67.362,27.695 ; v1@67.531,28.705 ccw(c67.985,28.16) C71.1@67.362,27.822 ; U12.2@59.385,19.406 cw(c64.857,19.406) 61.273,23.541 ccw(c64.857,19.406) U12.2@59.385,19.406 ; U12.2@59.385,19.406 ccw(c53.87,19.406) 57.507,23.552 cw(c53.87,19.406) U12.2@59.385,19.406 ; U12.2@59.385,19.406 U12.4@59.385,26.694 ; U12.4@59.385,26.694 ccw(c60.346,26.694) 60.193,25.745 cw(c60.346,26.694) U12.4@59.385,26.694 ; U12.4@59.385,26.694 cw(c58.295,26.694) 58.877,25.772 ccw(c58.295,26.694) U12.4@59.385,26.694 ; U12.4@59.385,26.694 U12.4@59.397,26.706 60.386,27.695 C71.1@67.362,27.695 ; U12.4@61.54,27.553 ccw(c61.894,28.082) U12.4@62.018,27.457 ; U12.4@61.54,27.553 ccw(c61.894,28.082) U12.4@62.018,27.457 ; U12.4@61.54,27.553 ccw(c61.894,28.082) U12.4@62.018,27.457 ; U12.4@61.56,27.268 ccw(c61.206,27.8) U12.4@61.833,27.674 ; U12.4@61.56,27.268 ccw(c61.206,27.8) U12.4@61.833,27.674 ; U12.4@61.56,27.268 ccw(c61.206,27.8) U12.4@61.833,27.674 ; v1(67.361,28.727) cw(c66.908,28.274) C71.1@67.362,27.822 ; v1(67.361,28.727) cw(c66.908,28.274) C71.1@67.362,27.822 ; v1(67.361,28.727) 67.362,28.726 C71.1@67.362,27.695 ; U12.4@58.91,26.068 cw(c57.764,24.922) 59.385,24.922 ccw(c57.764,24.922) U12.4@58.91,26.068 ; 59.385,22.187 cw(c62.446,22.187) 60.441,24.5 ccw(c62.446,22.187) 59.385,22.187 ; U12.4@59.385,24.37 cw(c61.787,24.37) 60.089,26.068 ccw(c61.787,24.37) U12.4@59.385,24.37 ; U12.4@60.524,26.578 cw(c63.222,23.88) 63.222,27.695 ccw(c63.222,23.88) U12.4@60.524,26.578 ; U12.4@60.524,28.833 ccw(c63.272,31.581) 63.272,27.695 cw(c63.272,31.581) U12.4@60.524,28.833 ; U12.4@61.422,25.68 cw(c66.288,20.814) 66.288,27.695 ccw(c66.288,20.814) U12.4@61.422,25.68 ; U12.4@61.422,29.731 ccw(c66.339,34.648) 66.339,27.695 cw(c66.339,34.648) U12.4@61.422,29.731 ; C74.1@65.175,27.695 ccw(c65.175,30.913) 67.451,28.638 cw(c65.175,30.913) C74.1@65.175,27.695
  other v1: 10.363,23.495 10.363,24.536 42.672,29.439 29.743,33.045 24.74,33.274 24.613,36.195 24.596,41.299 53.95,43.663 43.536,60.833 63.322,61.951 69.24,63.017 66.802,63.043 23.825,63.652 32.842,75.032 22.377,80.416
  other v3: 57.328,25.933 58.776,25.933 60.223,25.933 61.671,25.933 57.302,27.711 58.75,27.711 60.198,27.711 61.646,27.711 57.353,29.616 58.801,29.616 60.249,29.616 61.697,29.616 21.607,50.994
DC+5V: C56.1 C58.2 C70.1 C72.1 D4.K R28.1 R68.2 Re1.1 U10.5 U12.3 | length 136.5
  Top Layer w0.508: Re1.1@36.627,10.973 40.253,10.973 D4.K@40.475,11.195 ; Re1.1@36.978,10.622 cw(c37.824,9.775) 37.824,10.973 cw(c37.824,12.17) Re1.1@36.978,11.324 ; 37.934,10.973 ccw(c37.934,13.418) D4.K@39.664,11.689 ; 39.008,10.973 cw(c39.008,10.045) D4.K@39.664,10.701 ; 39.161,10.973 ccw(c39.161,12.192) D4.K@40.023,11.33 ; D4.K@40.449,11.392 D4.K@40.462,11.405 ; U10.5@48.26,23.927 50.343,21.844 ; R28.1@72.839,32.782 72.839,23.614 71.069,21.844 50.343,21.844 ; 49.702,22.485 cw(c50.584,23.367) 49.371,23.659 ccw(c50.584,23.367) 49.702,22.485 ; 49.702,22.485 ccw(c48.82,21.603) 48.528,22.816 cw(c48.82,21.603) 49.702,22.485 ; 50.343,21.844 cw(c51.617,23.118) 49.865,23.54 ccw(c51.617,23.118) 50.343,21.844 ; 50.343,21.844 ccw(c49.069,20.57) 48.647,22.322 cw(c49.069,20.57) 50.343,21.844 ; 72.839,31.862 cw(c73.759,31.862) 73.108,32.513 ccw(c73.759,31.862) 72.839,31.862 ; 72.839,31.862 ccw(c71.919,31.862) 72.57,32.513 cw(c71.919,31.862) 72.839,31.862
  Bottom Layer w1.27: R68.2@24.824,8.366 R68.2@25.74,8.366 ; C58.2@48.284,19.981 U10.5@48.284,23.903 ; U10.5@48.745,22.753 cw(c49.493,20.942) 50.473,22.639 cw(c51.439,24.312) U10.5@49.521,24.08 ; U10.5@49.073,23.098 cw(c48.29,19.381) C56.1@51.472,21.455 ; C70.1@54.127,26.645 54.06,26.712 C72.1@51.561,26.712 49.089,26.712 48.26,25.883 ; U12.3@57.074,19.406 53.289,19.406 52.629,20.066 C56.1@52.629,21.819 50.368,21.819 ; 48.26,25.883 cw(c47.389,25.883) 47.743,25.087 ccw(c47.389,25.883) 48.26,25.883 ; 48.26,25.883 ccw(c49.131,25.883) 48.777,25.087 cw(c49.131,25.883) 48.26,25.883 ; 48.26,25.883 U10.5@48.26,23.927 U10.5@48.284,23.903 ; U10.5@48.284,23.902 ccw(c51.729,27.348) 51.993,22.483 cw(c51.729,27.348) U10.5@48.284,23.902 ; U10.5@48.284,23.903 50.368,21.819 ; 50.368,21.819 cw(c52.393,23.844) 49.53,23.901 ccw(c52.393,23.844) 50.368,21.819 ; 50.368,21.819 ccw(c48.343,19.793) 48.285,22.657 cw(c48.343,19.793) 50.368,21.819 ; 50.423,21.819 cw(c50.423,20.213) 51.559,21.348 ccw(c50.423,20.213) 50.423,21.819 ; 50.423,21.819 ccw(c50.423,23.424) 51.559,22.289 cw(c50.423,23.424) 50.423,21.819 ; 52.629,20.213 cw(c54.234,20.213) 53.099,21.348 ccw(c54.234,20.213) 52.629,20.213 ; 52.629,20.213 ccw(c51.023,20.213) 52.159,21.348 cw(c51.023,20.213) 52.629,20.213 ; U10.5@47.362,23.029 cw(c45.136,20.802) 48.284,20.802 ccw(c45.136,20.802) U10.5@47.362,23.029 ; 48.284,20.919 cw(c51.268,20.919) 49.158,23.029 ccw(c51.268,20.919) 48.284,20.919 ; 50.297,21.89 ccw(c51.936,23.53) 52.062,21.214 cw(c51.936,23.53) 50.297,21.89
  other v4: 25.552,8.407 40.488,11.049
DC+24V: J6.5 R3.2 R19.2 R57.2 R58.2 R63.2 R64.2 | length 44.4
  Top Layer w0.635: R63.2@62.357,72.893 v5(62.357,75.362) ; v5@65.678,69.317 ccw(c64.771,70.888) 66.523,70.418 ; v5(65.837,69.042) 65.837,69.875 68.428,72.466 R57.2@68.428,72.868 ; R64.2@74.401,72.132 ccw(c73.736,72.797) R64.2@74.676,72.797 ; R64.2@74.676,72.085 R64.2@74.676,72.817 ; R64.2@74.676,72.551 ccw(c75.269,72.551) R64.2@74.85,72.132 ; R58.2@80.471,72.157 ccw(c79.929,72.699) 80.696,72.699 ccw(c81.462,72.699) R58.2@80.92,72.157 ; R58.2@80.696,72.085 R58.2@80.696,72.791 ; 62.357,74.158 cw(c61.192,74.158) 62.016,73.334 ccw(c61.192,74.158) 62.357,74.158 ; 62.357,74.158 ccw(c63.522,74.158) 62.698,73.334 cw(c63.522,74.158) 62.357,74.158 ; 62.357,74.595 cw(c63.124,74.595) 62.582,75.137 ccw(c63.124,74.595) 62.357,74.595 ; 62.357,74.595 ccw(c61.59,74.595) 62.132,75.137 cw(c61.59,74.595) 62.357,74.595 ; 65.837,69.809 cw(c65.07,69.809) 65.612,69.267 ccw(c65.07,69.809) 65.837,69.809 ; 65.837,69.809 ccw(c66.603,69.809) 66.061,69.267 cw(c66.603,69.809) 65.837,69.809 ; v5@65.519,69.042 cw(c66.764,69.042) 65.884,69.923 ccw(c66.764,69.042) v5@65.519,69.042 ; v5@66.154,69.042 cw(c68.932,69.042) 66.968,71.007 ccw(c68.932,69.042) v5@66.154,69.042 ; 67.391,71.429 ccw(c66.053,72.768) 67.945,72.768 cw(c66.053,72.768) 67.391,71.429
  Bottom Layer w0.635: v2@15.273,86.5 cw(c15.421,85.278) R19.2@16.291,86.149 ; R19.2@16.013,86.122 ccw(c15.265,85.709) v2(15.265,86.563) 15.876,86.563 R19.2@16.291,86.149 ; R19.2@16.515,86.051 cw(c17.752,84.815) v2@17.752,86.563 ; v2(17.78,86.563) 16.705,86.563 R19.2@16.291,86.149 ; v1(30.048,88.722) v1(30.048,87.122) 30.883,86.287 R3.2@32.181,86.287 ; R3.2@31.957,86.062 ccw(c31.415,85.52) 31.415,86.287 ccw(c31.415,87.053) R3.2@31.957,86.511 ; v5@65.612,68.818 ccw(c65.07,68.276) 65.07,69.042 ccw(c65.07,69.809) v5@65.612,69.267 ; v5(65.837,69.042) 65.888,69.042 v5@65.913,69.068 ; v5@66.061,68.818 cw(c66.665,68.214) 66.665,69.068 ; v5@66.061,69.267 ccw(c66.542,69.747) 66.542,69.068
  other v5: 74.676,72.288 80.721,72.339
DC-5V: C62.2 C63.1 R80.2 U10.3 | length 48.6
  Bottom Layer w0.508: v4(9.957,13.437) v4@9.965,13.428 ; R80.2@9.965,12.564 cw(c10.793,12.564) 10.22,13.161 ccw(c10.793,12.564) R80.2@9.965,12.564 ; R80.2@9.965,12.564 ccw(c9.172,12.564) 9.702,13.153 cw(c9.172,12.564) R80.2@9.965,12.564 ; R80.2@9.965,12.564 v4@9.965,13.428 ; v4@9.965,13.428 cw(c9.174,13.428) 9.708,12.845 ccw(c9.174,13.428) v4@9.965,13.428 ; v4@9.965,13.428 ccw(c10.756,13.428) 10.222,12.845 cw(c10.756,13.428) v4@9.965,13.428
  Bottom Layer w1.27: C63.1@48.284,7.281 48.284,3.631 U10.3@48.26,3.607 52.832,3.607 C62.2@52.959,3.48 ; U10.3@49.158,4.505 cw(c51.268,6.614) 48.284,6.614 ccw(c51.268,6.614) U10.3@49.158,4.505 ; U10.3@49.158,4.505 ccw(c51.326,6.673) C62.2@51.326,3.607 ; U10.3@49.158,4.505 ccw(c51.326,6.673) C62.2@51.326,3.607 ; 50.433,3.846 ccw(c50.977,5.874) C62.2@52.027,4.056 ; 50.433,3.846 ccw(c50.977,5.874) C62.2@52.027,4.056 ; 50.433,3.846 ccw(c50.977,5.874) C62.2@52.027,4.056 ; 50.446,3.371 cw(c50.842,1.892) C62.2@51.9,2.999 ; 50.446,3.371 cw(c50.842,1.892) C62.2@51.9,2.999 ; 50.446,3.371 cw(c50.842,1.892) C62.2@51.9,2.999 ; C62.2@51.326,3.607 ccw(c51.326,0.541) 49.158,2.709 cw(c51.326,0.541) C62.2@51.326,3.607 ; U10.3@47.362,4.505 ccw(c45.136,6.731) 48.284,6.731 cw(c45.136,6.731) U10.3@47.362,4.505 ; 50.447,3.607 cw(c50.447,1.568) 51.889,3.01 ccw(c50.447,1.568) 50.447,3.607 ; C62.2@51.06,3.607 ccw(c51.06,4.779) 51.889,3.95 cw(c51.06,4.779) C62.2@51.06,3.607
EARTH: C33.1 C35.1 pad.8@83,93 TP3.1 | length 23.5
  Bottom Layer w0.762: C33.1@79.268,88.036 83.033,88.036 TP3.1@83.083,87.986 83.236,87.833 C35.1@83.236,84.348 ; 80.38,88.036 cw(c80.38,89.048) 79.665,88.333 ccw(c80.38,89.048) 80.38,88.036 ; 80.38,88.036 ccw(c80.38,87.025) 79.665,87.74 cw(c80.38,87.025) 80.38,88.036 ; TP3.1@82.634,87.537 ccw(c81.428,86.33) 81.428,88.036 cw(c81.428,86.33) TP3.1@82.634,87.537 ; TP3.1@82.634,87.537 cw(c81.182,86.085) 83.236,86.085 ccw(c81.182,86.085) TP3.1@82.634,87.537 ; 83.236,85.46 cw(c82.224,85.46) 82.94,84.745 ccw(c82.224,85.46) 83.236,85.46 ; 83.236,85.46 ccw(c84.247,85.46) 83.532,84.745 cw(c84.247,85.46) 83.236,85.46 ; 81.673,88.036 ccw(c81.673,89.396) 82.634,88.435 cw(c81.673,89.396) 81.673,88.036 ; 83.236,86.82 cw(c84.249,86.82) 83.532,87.537 ccw(c84.249,86.82) 83.236,86.82
EME_AUDIO_A: J1.1 T6.5 | length 24.9
  Top Layer w0.508: J1.1@2.946,71.882 5.795,71.882 8.231,74.319 11.479,74.319 16.323,79.162 T6.5@16.323,82.41 ; J1.1@3.395,71.433 cw(c4.479,70.349) 4.479,71.882 cw(c4.479,73.415) J1.1@3.395,72.331 ; T6.5@15.795,81.882 cw(c14.522,80.609) 16.323,80.609 cw(c18.124,80.609) T6.5@16.85,81.882
EME_AUDIO_B: J1.2 T6.3 | length 18
  Top Layer w0.508: J1.2@2.946,74.422 5.69,74.422 10.643,79.375 T6.3@10.643,82.41 ; J1.2@3.395,73.973 cw(c4.479,72.889) 4.479,74.422 cw(c4.479,75.955) J1.2@3.395,74.871 ; T6.3@10.115,81.882 cw(c8.842,80.609) 10.643,80.609 cw(c12.444,80.609) T6.3@11.17,81.882
EME_CLK_CPU: U1.104
EME_DATA_CPU: U1.103
EME_RE_CPU: U1.54
EME_RELAY: O10.3 R6.1 R97.2 | length 112.7
  Top Layer w0.254: v1(15.113,75.616) 18.771,75.616 19.787,74.6 19.787,66.827 17.577,64.618 17.577,52.857 15.748,51.029 15.748,42.291 16.129,41.91 16.205,41.91 v2(16.408,41.707)
  Bottom Layer w0.254: v2(16.408,41.707) 17.399,40.716 17.399,36.83 4.801,24.232 4.801,7.645 10.201,2.245 R6.1@27.415,2.245 ; R6.1@26.929,1.885 ccw(c26.061,1.018) 26.061,2.245 ccw(c26.061,3.471) R6.1@26.929,2.604
  Bottom Layer w0.508: v1(15.113,75.616) O10.3@16.485,75.616 18.746,75.616 R97.2@19.212,75.15 ; O10.3@15.726,75.616 cw(c15.726,76.229) 15.293,75.795 ccw(c15.726,76.229) O10.3@15.726,75.616 ; O10.3@15.726,75.616 ccw(c15.726,75.003) 15.293,75.436 cw(c15.726,75.003) O10.3@15.726,75.616
ETHCLK: IC2.34 U1.35 Y1.3 | length 67.8
  Top Layer w0.254: U1.35@24.173,51.816 24.173,54.374 ; 24.34,54.67 cw(c24.926,54.536) v1@24.754,55.113 ; 24.469,54.54 ccw(c24.336,55.127) v1@24.912,54.955 ; v1(24.79,54.991) 24.173,54.374 ; v1(45.441,52.908) 45.568,53.035 48.311,53.035 49.784,51.562 49.784,51.105 49.819,51.14 IC2.34@52.917,51.14 ; 48.688,52.658 cw(c47.36,51.33) Y1.3@49.238,51.33 ; 48.887,52.459 cw(c47.733,51.305) Y1.3@49.365,51.305 ; 48.941,52.405 ccw(c49.911,53.375) Y1.3@49.911,52.003 ; 49.074,52.272 ccw(c49.784,52.982) Y1.3@49.784,51.978 ; 49.122,52.224 cw(c48.227,51.33) Y1.3@49.492,51.33 ; Y1.3@49.32,52.026 cw(c48.6,51.305) Y1.3@49.619,51.305 ; Y1.3@49.375,51.971 ccw(c49.911,52.508) Y1.3@49.911,51.749 ; Y1.3@50.08,50.809 cw(c50.88,50.009) 50.88,51.14 ; Y1.3@50.08,51.401 ccw(c50.712,52.032) 50.712,51.14 ; Y1.3@50.207,50.834 cw(c50.945,50.096) 50.945,51.14 ; Y1.3@50.207,51.426 ccw(c50.9,52.119) 50.9,51.14 ; Y1.3@50.26,50.629 cw(c51.493,49.396) 51.493,51.14 ; Y1.3@50.26,51.581 ccw(c51.325,52.646) 51.325,51.14 ; Y1.3@50.387,50.654 cw(c51.558,49.483) 51.558,51.14 ; Y1.3@50.387,51.606 ccw(c51.513,52.732) 51.513,51.14 ; 24.173,54.374 cw(c24.745,53.802) 24.776,54.61 ccw(c24.745,53.802) 24.173,54.374 ; 24.173,54.374 ccw(c23.602,54.946) 24.41,54.977 cw(c23.602,54.946) 24.173,54.374 ; 46.054,53.035 cw(c46.054,53.521) 45.71,53.178 ccw(c46.054,53.521) 46.054,53.035 ; 46.054,53.035 ccw(c46.054,52.295) 45.53,52.818 cw(c46.054,52.295) 46.054,53.035 ; v1@45.71,52.639 cw(c46.667,51.682) 46.667,53.035 ccw(c46.667,51.682) v1@45.71,52.639
  Bottom Layer w0.254: v1(24.79,54.991) 24.79,53.442 25.603,52.629 45.161,52.629 v1(45.441,52.908) ; 44.515,52.799 cw(c44.757,52.381) v1@45.139,52.676 ; 44.767,52.944 cw(c44.989,52.56) v1@45.34,52.831 ; v1@45.072,53.003 cw(c44.608,53.122) 44.847,52.707 cw(c44.97,52.494) v1@45.154,52.657 ; 24.79,54.071 cw(c25.71,54.071) 25.06,54.722 ccw(c25.71,54.071) 24.79,54.071 ; 24.79,54.071 ccw(c23.871,54.071) 24.521,54.722 cw(c23.871,54.071) 24.79,54.071 ; 43.846,52.629 ccw(c43.846,54.503) 45.171,53.178 cw(c43.846,54.503) 43.846,52.629 ; 44.459,52.629 ccw(c44.459,53.889) 45.351,52.998 cw(c44.459,53.889) 44.459,52.629
ETHCRS: R4.5 U1.43 | length 51.3
  Top Layer w0.254: v2(18.847,46.584) 18.864,46.566 U1.43@21.423,46.566 ; v2(55.728,42.723) R4.5@55.728,44.272 ; 55.728,43.336 cw(c55.114,43.336) 55.548,42.902 ccw(c55.114,43.336) 55.728,43.336 ; 55.728,43.336 ccw(c56.341,43.336) 55.907,42.902 cw(c56.341,43.336) 55.728,43.336 ; 55.728,43.72 cw(c56.034,43.72) 55.817,43.936 ccw(c56.034,43.72) 55.728,43.72 ; 55.728,43.72 ccw(c55.421,43.72) 55.638,43.936 cw(c55.421,43.72) 55.728,43.72 ; v2@19.026,46.404 cw(c19.418,46.013) 19.418,46.566 ccw(c19.418,46.013) v2@19.026,46.404 ; v2@19.026,46.763 ccw(c19.502,47.239) 19.502,46.566 cw(c19.502,47.239) v2@19.026,46.763
  Bottom Layer w0.254: v2(18.847,46.584) 20.447,46.584 22.454,44.577 39.192,44.577 39.7,44.069 52.07,44.069 53.416,42.723 v2(55.728,42.723) ; 19.46,46.584 cw(c19.46,47.197) 19.026,46.763 ccw(c19.46,47.197) 19.46,46.584 ; 19.46,46.584 ccw(c19.46,45.97) 19.026,46.404 cw(c19.46,45.97) 19.46,46.584 ; 55.114,42.723 cw(c55.114,42.11) 55.548,42.543 ccw(c55.114,42.11) 55.114,42.723 ; 55.114,42.723 ccw(c55.114,43.336) 55.548,42.902 cw(c55.114,43.336) 55.114,42.723
ETHMDC: R20.2 U1.27 | length 39.7
  Top Layer w0.254: v1@27.157,54.147 ccw(c27.881,54.762) 27.805,53.815 ; v1@27.33,54.432 28.173,53.589 ; U1.27@28.173,51.816 28.173,53.589 ; 28.173,53.589 ccw(c27.496,52.911) 27.323,53.854 cw(c27.496,52.911) 28.173,53.589 ; v1@27.277,54.104 cw(c27.39,53.49) 27.831,53.931 ccw(c27.39,53.49) v1@27.277,54.104
  Bottom Layer w0.254: v1(27.254,54.229) 28.169,53.315 43.967,53.315 45.253,54.601 R20.2@45.788,54.601 ; 44.779,53.856 ccw(c44.428,55.167) R20.2@45.661,54.601 ; 44.881,54.138 ccw(c44.685,54.871) R20.2@45.416,54.668 ; R20.2@45.112,54.199 cw(c45.213,53.824) R20.2@45.407,54.161 ; R20.2@45.301,53.996 ccw(c45.066,54.874) R20.2@45.892,54.495 ; 27.905,53.579 cw(c28.555,54.229) 27.635,54.229 ccw(c28.555,54.229) 27.905,53.579 ; 27.905,53.579 ccw(c27.254,52.928) 27.254,53.848 cw(c27.254,52.928) 27.905,53.579 ; R20.2@45.661,54.601 ccw(c45.661,53.617) 44.965,54.312 cw(c45.661,53.617) R20.2@45.661,54.601 ; 44.098,53.445 cw(c45.661,51.882) 45.661,54.093 ccw(c45.661,51.882) 44.098,53.445 ; 44.532,53.879 cw(c45.661,52.749) 45.661,54.347 ccw(c45.661,52.749) 44.532,53.879
ETHMDIO: R22.2 U1.36 | length 29.8
  Top Layer w0.254: v1@22.942,55.206 ccw(c23.526,55.395) 23.395,54.796 ; v1(23.063,55.245) 23.673,54.635 ; v1@23.102,55.366 cw(c22.913,54.782) 23.513,54.913 ; U1.36@23.673,51.816 23.673,54.635 ; 23.673,54.635 cw(c24.23,55.191) 23.444,55.227 ccw(c24.23,55.191) 23.673,54.635 ; 23.673,54.635 ccw(c23.117,54.079) 23.081,54.864 cw(c23.117,54.079) 23.673,54.635
  Bottom Layer w0.254: v1(23.063,55.245) 23.867,56.048 R22.2@37.152,56.048 ; 23.714,55.895 cw(c23.063,56.546) 23.063,55.626 ccw(c23.063,56.546) 23.714,55.895 ; 23.714,55.895 ccw(c24.364,55.245) 23.444,55.245 cw(c24.364,55.245) 23.714,55.895 ; 35.661,56.048 cw(c35.661,54.735) 36.59,55.664 ccw(c35.661,54.735) 35.661,56.048 ; 35.784,56.048 ccw(c35.784,57.188) 36.59,56.382 cw(c35.784,57.188) 35.784,56.048 ; 36.274,56.048 cw(c36.274,55.348) 36.769,55.843 ccw(c36.274,55.348) 36.274,56.048
ETHRXD0: R4.7 U1.44 | length 55.3
  Top Layer w0.254: v2(18.339,45.542) 19.1,45.542 19.624,46.066 U1.44@21.423,46.066 ; 57.278,42.403 cw(c56.793,42.509) v2(56.947,42.037) ; 57.313,42.368 ccw(c57.419,41.883) v2(56.947,42.037) ; R4.7@57.353,44.272 57.353,42.443 ; 18.952,45.542 cw(c18.952,46.155) 18.518,45.722 ccw(c18.952,46.155) 18.952,45.542 ; 18.952,45.542 ccw(c18.952,44.929) 18.518,45.363 cw(c18.952,44.929) 18.952,45.542 ; v2(56.947,42.037) 57.353,42.443 ; 57.353,42.443 cw(c56.983,42.813) 56.959,42.291 ccw(c56.983,42.813) 57.353,42.443 ; 57.353,42.443 ccw(c57.723,42.073) 57.201,42.049 cw(c57.723,42.073) 57.353,42.443 ; 57.353,43.72 cw(c57.66,43.72) 57.443,43.936 ccw(c57.66,43.72) 57.353,43.72 ; 57.353,43.72 ccw(c57.047,43.72) 57.263,43.936 cw(c57.047,43.72) 57.353,43.72
  Bottom Layer w0.254: v2(18.339,45.542) 20.574,45.542 22.174,43.942 39.116,43.942 39.599,43.459 51.74,43.459 53.162,42.037 v2(56.947,42.037) ; 18.952,45.542 cw(c18.952,46.155) 18.518,45.722 ccw(c18.952,46.155) 18.952,45.542 ; 18.952,45.542 ccw(c18.952,44.929) 18.518,45.363 cw(c18.952,44.929) 18.952,45.542 ; 56.334,42.037 cw(c56.334,41.424) 56.767,41.857 ccw(c56.334,41.424) 56.334,42.037 ; 56.334,42.037 ccw(c56.334,42.65) 56.767,42.217 cw(c56.334,42.65) 56.334,42.037
ETHRXD1: R4.8 U1.45 | length 55
  Top Layer w0.254: v2(19.075,44.577) ccw(c18.921,45.078) 19.427,44.942 ; v2@19.228,44.806 19.988,45.566 U1.45@21.423,45.566 ; v2(58.166,41.377) R4.8@58.166,44.272 ; 58.166,41.99 cw(c57.553,41.99) 57.986,41.556 ccw(c57.553,41.99) 58.166,41.99 ; 58.166,41.99 ccw(c58.779,41.99) 58.346,41.556 cw(c58.779,41.99) 58.166,41.99 ; 58.166,43.72 cw(c58.473,43.72) 58.256,43.936 ccw(c58.473,43.72) 58.166,43.72 ; 58.166,43.72 ccw(c57.859,43.72) 58.076,43.936 cw(c57.859,43.72) 58.166,43.72 ; v2@19.075,44.831 ccw(c19.075,45.26) 19.379,44.957 cw(c19.075,45.26) v2@19.075,44.831 ; v2@19.329,44.577 cw(c20.127,44.577) 19.563,45.141 ccw(c20.127,44.577) v2@19.329,44.577
  Bottom Layer w0.254: v2(19.075,44.577) 20.625,44.577 21.92,43.282 38.964,43.282 39.345,42.901 51.283,42.901 52.832,41.351 58.141,41.351 v2(58.166,41.377) ; 19.689,44.577 cw(c19.689,45.19) 19.255,44.757 ccw(c19.689,45.19) 19.689,44.577 ; 19.689,44.577 ccw(c19.689,43.964) 19.255,44.397 cw(c19.689,43.964) 19.689,44.577 ; 57.491,41.351 ccw(c57.491,42.051) 57.986,41.556 cw(c57.491,42.051) 57.491,41.351 ; 57.614,41.351 cw(c57.614,40.825) 57.986,41.197 ccw(c57.614,40.825) 57.614,41.351
ETHTXD0: R17.7 U1.128 | length 50.7
  Top Layer w0.178: U1.128@43.423,41.566 45.404,41.566 v2(46.177,40.792) ; 45.813,41.061 ccw(c46.257,41.18) v2@46.164,40.73 ; 45.908,41.157 cw(c45.79,40.713) v2@46.239,40.805 ; R17.7@65.913,51.029 67.259,51.029 67.539,50.749 67.539,42.367 66.827,41.656 v2(66.827,40.183) ; 45.679,41.291 cw(c45.18,40.792) 45.885,40.792 ccw(c45.18,40.792) 45.679,41.291 ; 45.679,41.291 ccw(c46.177,41.79) 46.177,41.084 cw(c46.177,41.79) 45.679,41.291 ; 66.558,51.029 cw(c66.558,51.427) 66.276,51.145 ccw(c66.558,51.427) 66.558,51.029 ; 66.558,51.029 ccw(c66.558,50.63) 66.276,50.912 cw(c66.558,50.63) 66.558,51.029 ; 66.827,40.888 cw(c66.122,40.888) 66.621,40.389 ccw(c66.122,40.888) 66.827,40.888 ; 66.827,40.888 ccw(c67.533,40.888) 67.034,40.389 cw(c67.533,40.888) 66.827,40.888
  Bottom Layer w0.178: v2@46.115,40.78 ccw(c46.565,40.872) 46.446,40.428 ; v2(46.177,40.792) 47.295,39.675 60.726,39.675 61.869,40.818 66.192,40.818 v2(66.827,40.183) ; v2@46.19,40.855 cw(c46.098,40.405) 46.541,40.524 ; 66.463,40.452 ccw(c66.907,40.57) v2@66.815,40.121 ; 66.559,40.547 cw(c66.44,40.103) v2@66.89,40.196 ; 46.676,40.294 cw(c47.174,40.792) 46.469,40.792 ccw(c47.174,40.792) 46.676,40.294 ; 46.676,40.294 ccw(c46.177,39.795) 46.177,40.5 cw(c46.177,39.795) 46.676,40.294 ; 66.329,40.681 cw(c65.83,40.183) 66.535,40.183 ccw(c65.83,40.183) 66.329,40.681 ; 66.329,40.681 ccw(c66.827,41.18) 66.827,40.475 cw(c66.827,41.18) 66.329,40.681